# Altium PCB Motor_Driver.PcbDoc
Units mil, origin at the board's own origin, x right, y up, seen from the top; angles counter-clockwise.
Board outline 910 x 1160 mil, 2 copper layers (Top Layer, Bottom Layer); 16 components, 16 nets, 46 pads, 15 vias.
Unrouted connection lines stored in the file: 1.
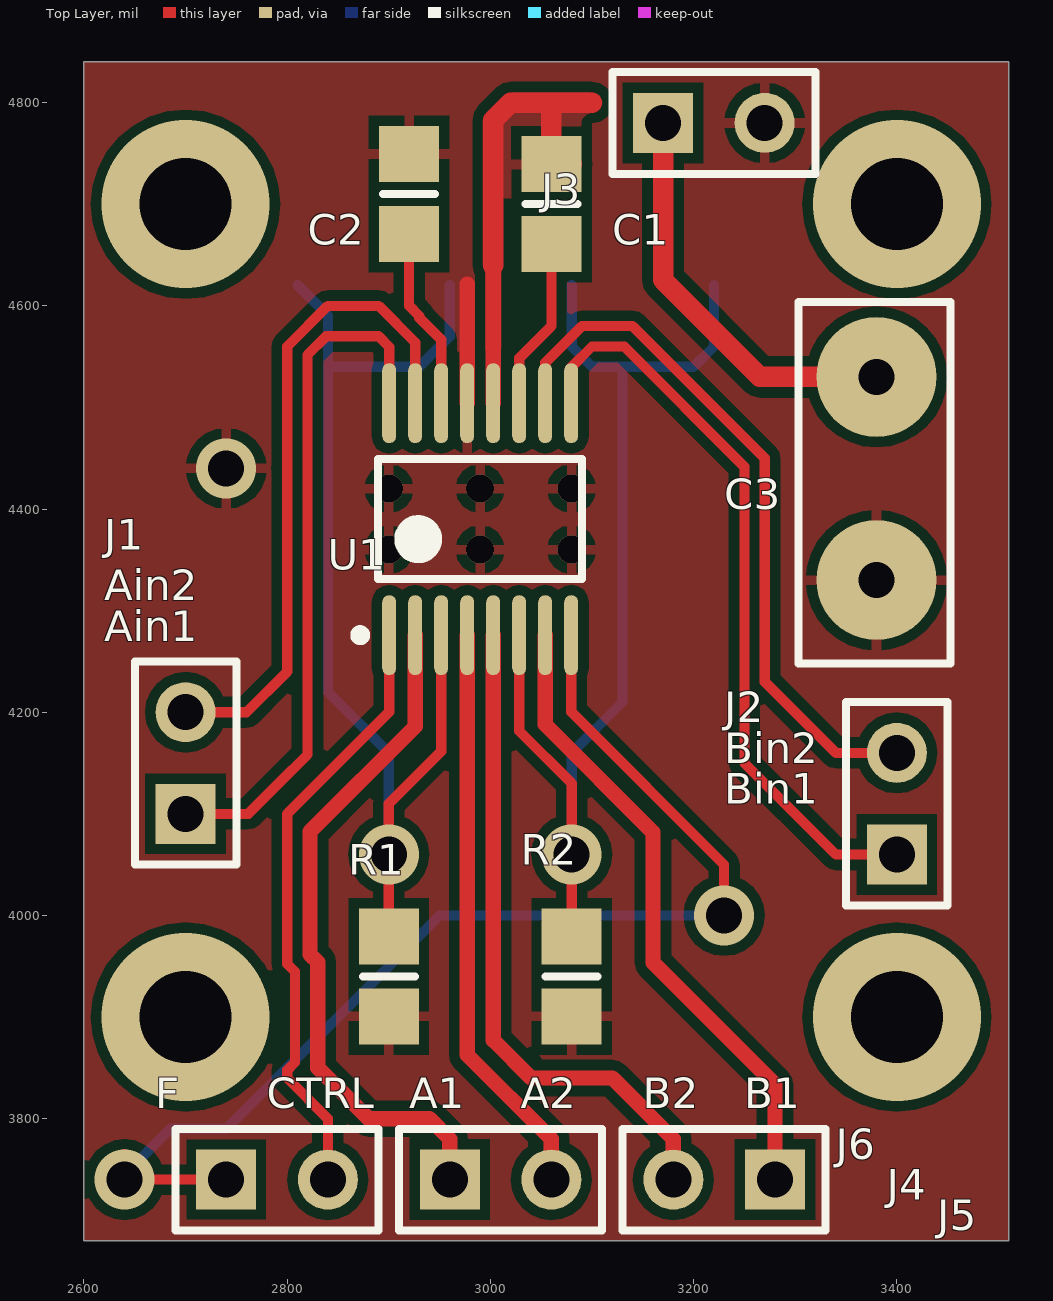
[diagram p0: Top Layer view]
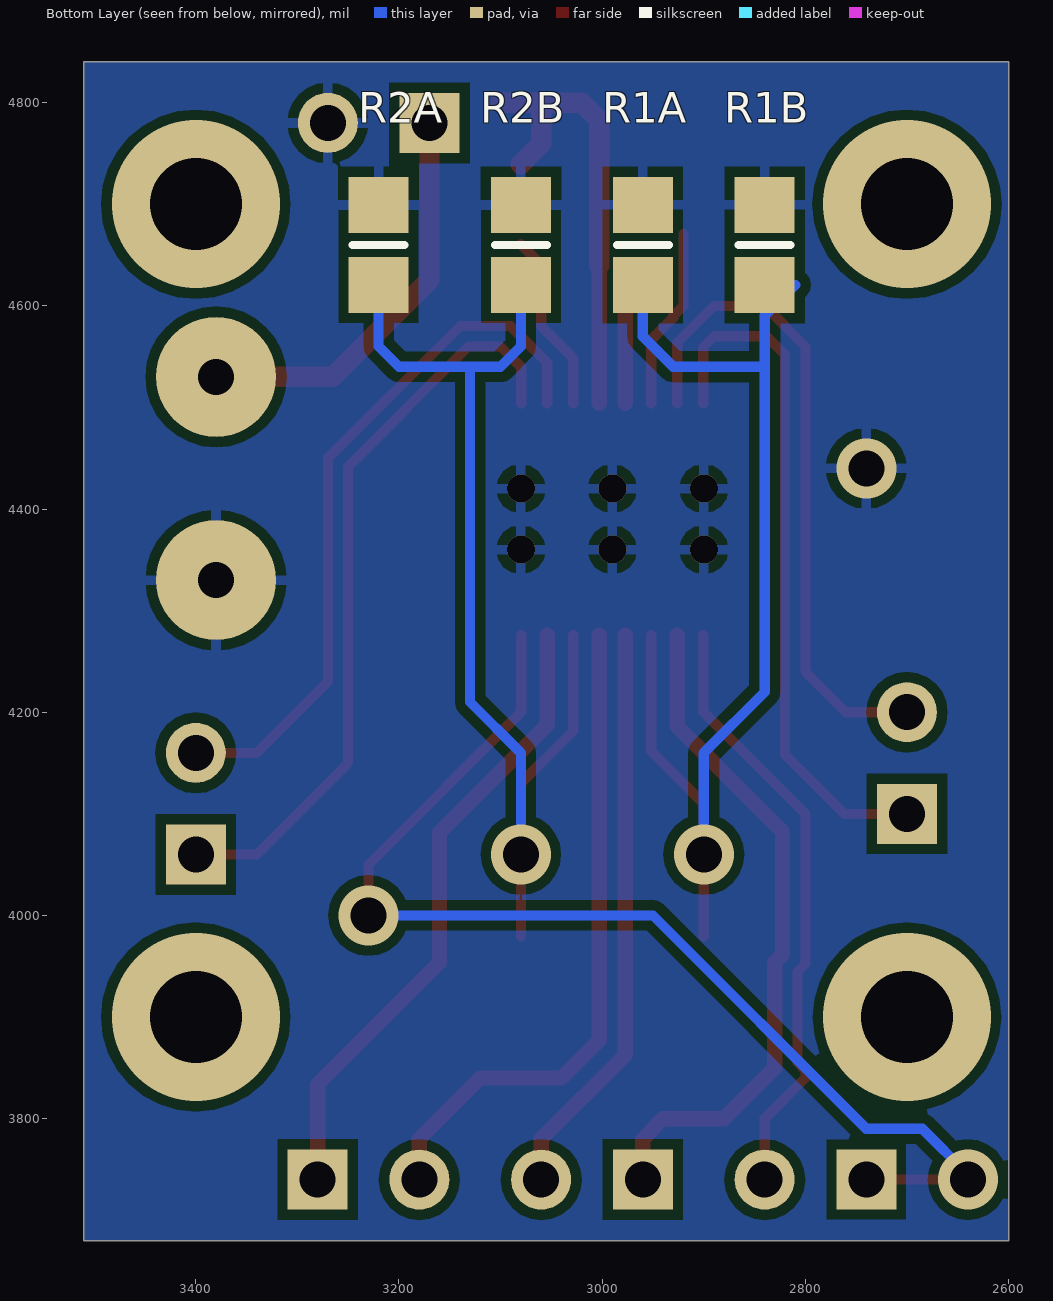
[diagram p1: Bottom Layer view, seen from below]

## Layer stack, top to bottom
Top Layer: signal copper 1.4
Dielectric: dielectric 12.6, FR-4, Dk 4.8
Bottom Layer: signal copper 1.4

## Board outline
3510,3680 3510,4840 2600,4840 2600,3680

## Design rules (kind name [scope] priority, off if disabled: settings)
Clearance [All] p1: gap=10
PolygonConnect [All] p1: connectstyle=Relief reliefconductorwidth=10 reliefentries=4 polygonreliefangle="90 Angle" airgapwidth=10
RoutingVias [All] p1: holewidth=28 width=50 viastyle="Through Hole" minholewidth=28 minwidth=50 maxholewidth=28 maxwidth=50
SolderMaskExpansion [All] p1: expansion=4
Width [All] p1: maxlimit=20 minlimit=10 preferedwidth=10
28 further rules are at their usual default settings.

## Components (designator, comment, footprint, x,y, rotation, side; value= is the part's Value field where it differs from the comment)
C1 "cap" 6-0805_M 3060,4700 r90 top
C2 "cap" 6-0805_M 2920,4710 r270 top
C3 "Cap Electrolytic" capacitor_3d 3380,4530 r270 top
J1 "Header 2" HDR1X2 2700,4100 r90 top
J2 "Header 2" HDR1X2 3400,4060 r90 top
J3 "Header 2" HDR1X2 3170,4780 r0 top
J4 "Header 2" HDR1X2 2960,3740 r0 top
J5 "Header 2" HDR1X2 3280,3740 r180 top
J6 "Header 2" HDR1X2 2740,3740 r0 top
R1 "Res1" 6-0805_M 2900,3940 r90 top
R1A "Res1" 6-0805_M 2960,4660 r270 bottom
R1B "Res1" 6-0805_M 2840,4660 r270 bottom
R2 "Res1" 6-0805_M 3080,3940 r90 top
R2A "Res1" 6-0805_M 3220,4660 r270 bottom
R2B "Res1" 6-0805_M 3080,4660 r270 bottom
U1 "DRV8833PWR" TI-PW16_M 2990,4390 r90 top

## Footprints (in the part's own frame and the unit in brackets; to place one, negate y for a bottom-side part, rotate by r counter-clockwise, add the part's x,y. Pads: shape width x height; smd on the part's side, far side on the other; paste and mask are expansions set on the pad)
6-0805_M [mm] "Chip Resistor, Body 2.0x1.2mm, IPC Low Density"
  rect 1.4x1.5 smd: 1(-1,0) 2(1,0)
  silkscreen extent 0,-0.65 0,0.65, body extent -1.07,-0.7 1.07,0.7, height 0.7
capacitor_3d [mm] "3d model for through hole capacitor"
  round 3 hole 0.9: 1(-0.003,0) 2(5.08,0)
  silkscreen extent -1.88,-1.95 7.16,1.86, body extent -0.55,-0.89 5.63,0.89, height 5
HDR1X2 [mm] "Connector; Header; 2 Position"
  rect 1.5x1.5 hole 0.9: 1(0,0)
  round 1.5 hole 0.9: 2(2.54,0)
  silkscreen extent -1.27,-1.27 3.81,1.27
TI-PW16_M [mm] "SOP, 16-Leads, Body 5x4.4mm, Pitch 0.65mm, IPC Low Density"
  oval 2x0.35 smd: 1(-2.9,2.275) 2(-2.9,1.625) 3(-2.9,0.975) 4(-2.9,0.325) 5(-2.9,-0.325) 6(-2.9,-0.975) 7(-2.9,-1.625) 8(-2.9,-2.275) 9(2.9,-2.275) 10(2.9,-1.625) 11(2.9,-0.975) 12(2.9,-0.325) 13(2.9,0.325) 14(2.9,0.975) 15(2.9,1.625) 16(2.9,2.275)
  silkscreen extent -3.02,-2.55 1.5,3.12, body extent -2.25,-2.55 2.25,2.55, height 1.2

## Part data
C1 C2: "Capacitor"
C3: library part "Cap Pol1", "Polarized Capacitor (Radial)"
J1 J2 J3 J4 J5 J6: "Header, 2-Pin"
R1 R1A R1B R2 R2A R2B: "Resistor"
U1: library part CMP-1529-00001-1, "2 A Low Voltage Dual Brushed DC or Single Bipolar Stepper Motor Driver (PWM Ctrl), 2.7 to 10.8 V, -40 to 85 degC, 16-Pin SOP (PW), Green (RoHS & no Sb/Br), Tape and Reel"

## Via types
v1: diameter 27.56, hole 27.56, Top Layer to Bottom Layer, 6 vias
v2: diameter 59.06, hole 35.43, Top Layer to Bottom Layer, 5 vias
v3: diameter 165.35, hole 90.55, Top Layer to Bottom Layer, 3 vias
v4: diameter 165.35, hole 90.55, Top Layer to Bottom Layer, tented top, 1 vias

## Nets (pads, with @x,y where several pads share a name; then routed paths per layer and width w, separated by ;. In a path a pad name is that pad's centre, name@x,y a point inside that pad or via, vN(x,y) a via of type N, cw(c..) or ccw(c..) an arc to the next point about the centre after c; other vN are vias at no path point)
AIN1: J1.1 U1.16 | length 685.3
  Top Layer w10: J1.1 2761.72,4100 2790.86,4129.14 2820,4158.28 2820,4551.72 2838.28,4570 2890,4570 2900.43,4559.57 U1.16
AIN2: J1.2 U1.15 | length 653.9
  Top Layer w10: J1.2 2760,4200 2800,4240 2800,4560 2840,4600 2890,4600 2926.02,4563.98 U1.15
AOUT1: J4.1 U1.2 | length 670.8
  Top Layer w15: U1.2 2926.02,4186.02 2822.5,4082.5 2822.5,3961.6 2830.18,3953.92 2830.18,3849.82 2880,3800 2940,3800 2960,3780 J4.1
AOUT2: J4.2 U1.4 | length 570.1
  Top Layer w15: U1.4 2977.2,3862.8 3060,3780 J4.2
BATTERY: C1.2 C3.1 J3.1 U1.12 | length 856
  Top Layer w15: U1.12 3002.8,4640
  Top Layer w20: 3002.8,4640 3002.8,4782.8 3020,4800 3060,4800 ; C1.2@3080,4739.37 3060,4759.37 3060,4800 ; 3100,4800 3060,4800 ; J3.1 3170,4625.36 3265.25,4530.1 C3.1
BIN1: J2.1 U1.9 | length 742.3
  Top Layer w10: U1.9 3079.57,4539.57 3100,4560 3131.72,4560 3250,4441.72 3250,4150 3340,4060 J2.1
BIN2: J2.2 U1.10 | length 703.6
  Top Layer w10: U1.10 3053.98,4543.98 3090,4580 3140,4580 3270,4450 3270,4230 3340,4160 J2.2
BOUT1: J5.1 U1.7 | length 629.4
  Top Layer w15: U1.7 3053.98,4187.84 3160,4081.82 3160,3953.49 3280,3833.49 J5.1
BOUT2: J5.2 U1.5 | length 656.1
  Top Layer w15: U1.5 3002.8,3877.2 3040,3840 3120,3840 3180,3780 J5.2
CONTROL: J6.2 U1.1 | length 600.4
  Top Layer w10: J6.2 2840,3800 2800,3840 2800,3847.72 2807.68,3855.4 2807.68,3944.6 2800,3952.28 2800,4100 2900.43,4200.43 U1.1
FAULT: J6.1 U1.8 | length 1163.8
  Top Layer w10: v2@2640,3765 v2(2640,3740) J6.1 ; U1.8 3079.57,4200.43 3230,4050 v2(3230,4000)
  Bottom Layer w10: v2(2640,3740) 2640,3745 2685,3790 2740,3790 2950,4000 v2(3230,4000)
GND: C2.1 C3.2 J3.2 R1.1 R1A.1 R1B.1 R2.1 R2A.1 R2B.1 U1.13 | length 117.2
  Top Layer w15: U1.13 2977.2,4621.41
  other v1: 2900,4360 2990,4360 3080,4360 2900,4420 2990,4420 3080,4420
  other v2: 2740,4440
NetC1_1: C1.1 U1.11 | length 177.8
  Top Layer w10: U1.11 3028.39,4548.39 3060,4580 3060,4640.63 C1.1@3080,4660.63
SENSE1: R1.2 R1A.2 R1B.2 U1.3 | length 1098.8
  Top Layer w10: R1.2 v2(2900,4060) 2900,4110 2951.61,4161.61 U1.3
  Bottom Layer w10: 2810,4620.63 2840,4590.63 2840,4220 2900,4160 v2(2900,4060) ; 2840,4540 2930,4540 2960,4570 R1A.2
SENSE2: R2.2 R2A.2 R2B.2 U1.6 | length 1096.4
  Top Layer w10: U1.6 3028.39,4181.61 3080,4130 v2(3080,4060) R2.2
  Bottom Layer w10: v2(3080,4060) 3080,4160 3130,4210 3130,4540 ; R2B.2 3080,4560 3100,4540 3130,4540 ; R2A.2 3220,4560 3200,4540 3130,4540
VINT: C2.2 U1.14 | length 179.6
  Top Layer w10: C2.2 2920,4600 2930,4590 2930,4588.28 2951.61,4566.67 U1.14
copper on no net:
  other v3: 2700,3900 2700,4700 3400,4700
  other v4: 3400,3900

## Polygon pours and split planes (outlines as drawn)
GND on Bottom Layer "GND" (solid, remove dead copper, pour order 3): 2600,4840 3510,4840 3510,3680 2600,3680
BATTERY on Top Layer "BATTERY" (solid, remove dead copper, pour order 6): 3220,4830 3220,4664.29 3105,4664.29 3105,4705.71 3010.91,4705.71 3010.91,4581.43 3010.91,4557.82 2992.92,4540 2990,4542.9 2990,4830 3220,4830
GND on Top Layer "GND" (solid, remove dead copper, pour order 2): 2600,4840 3510,4840 3510,3680 2600,3680 2600,4840

## Silkscreen, mask and mechanical layers (free items; w line width, h text height)
Top Overlay:
  text "Ain2" at 2620,4310 h30
  text "Ain1" at 2620,4270 h30
  text "Bin2" at 3230,4150 h30
  text "Bin1" at 3230,4110 h30
  text "F" at 2670,3810 h30
  text "CTRL" at 2780,3810 h30
  text "A1" at 2920,3810 h30
  text "A2" at 3030,3810 h30
  text "B2" at 3150,3810 h30
  text "B1" at 3250,3810 h30